# EAGLE board synapse (EAGLE 7.3.0)
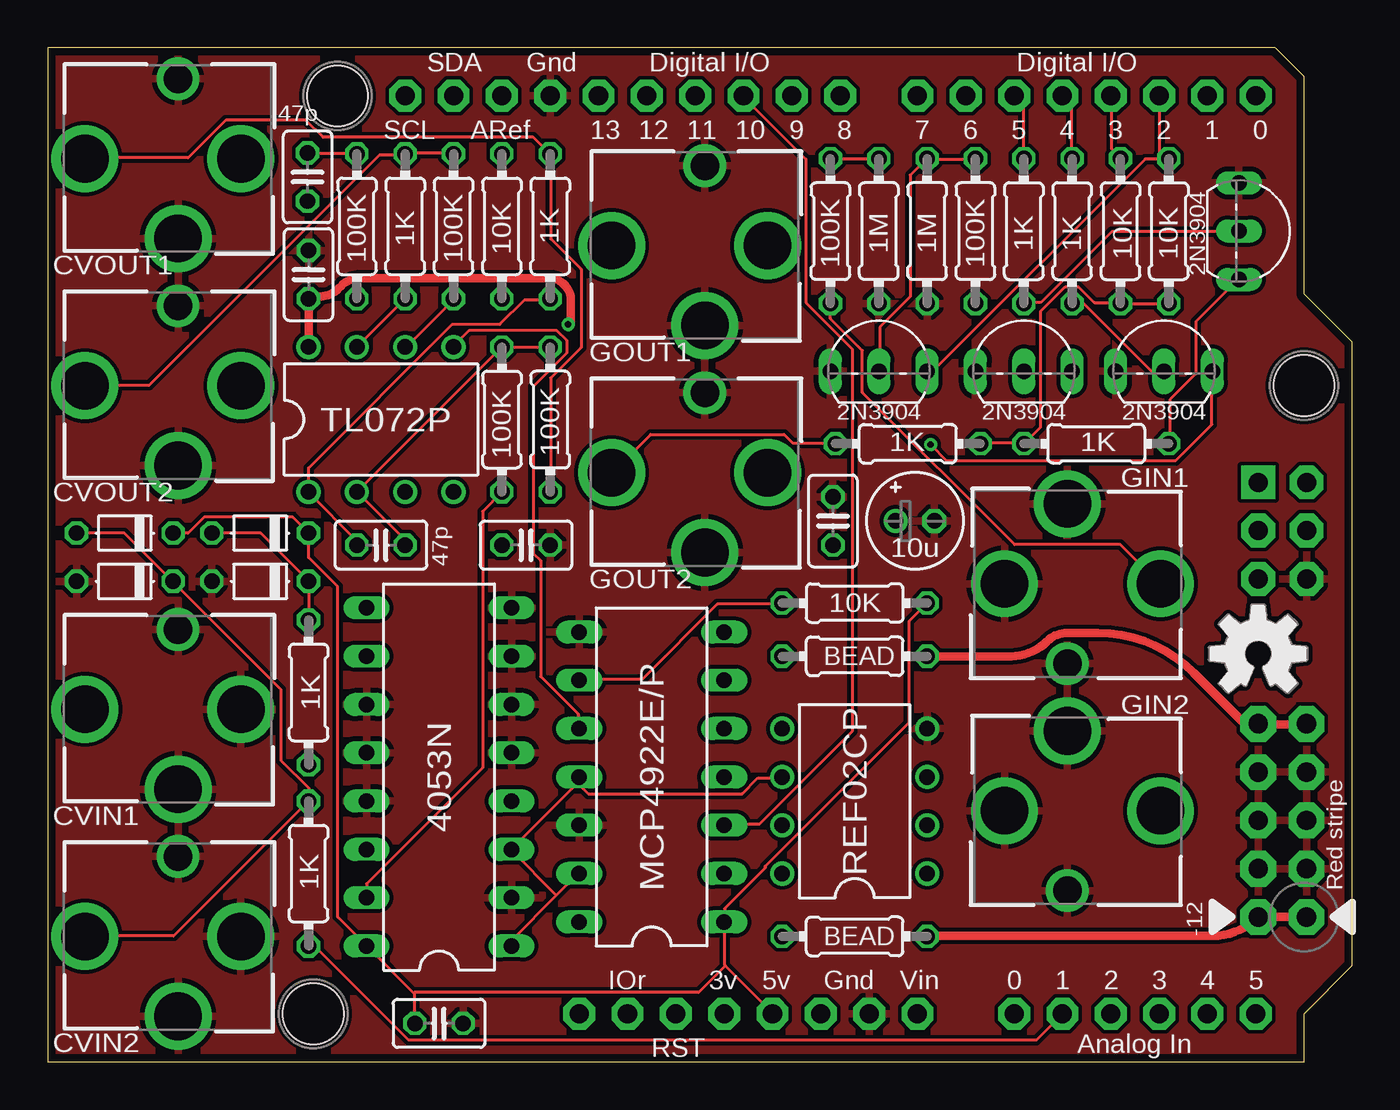
[diagram p0: board, top side]
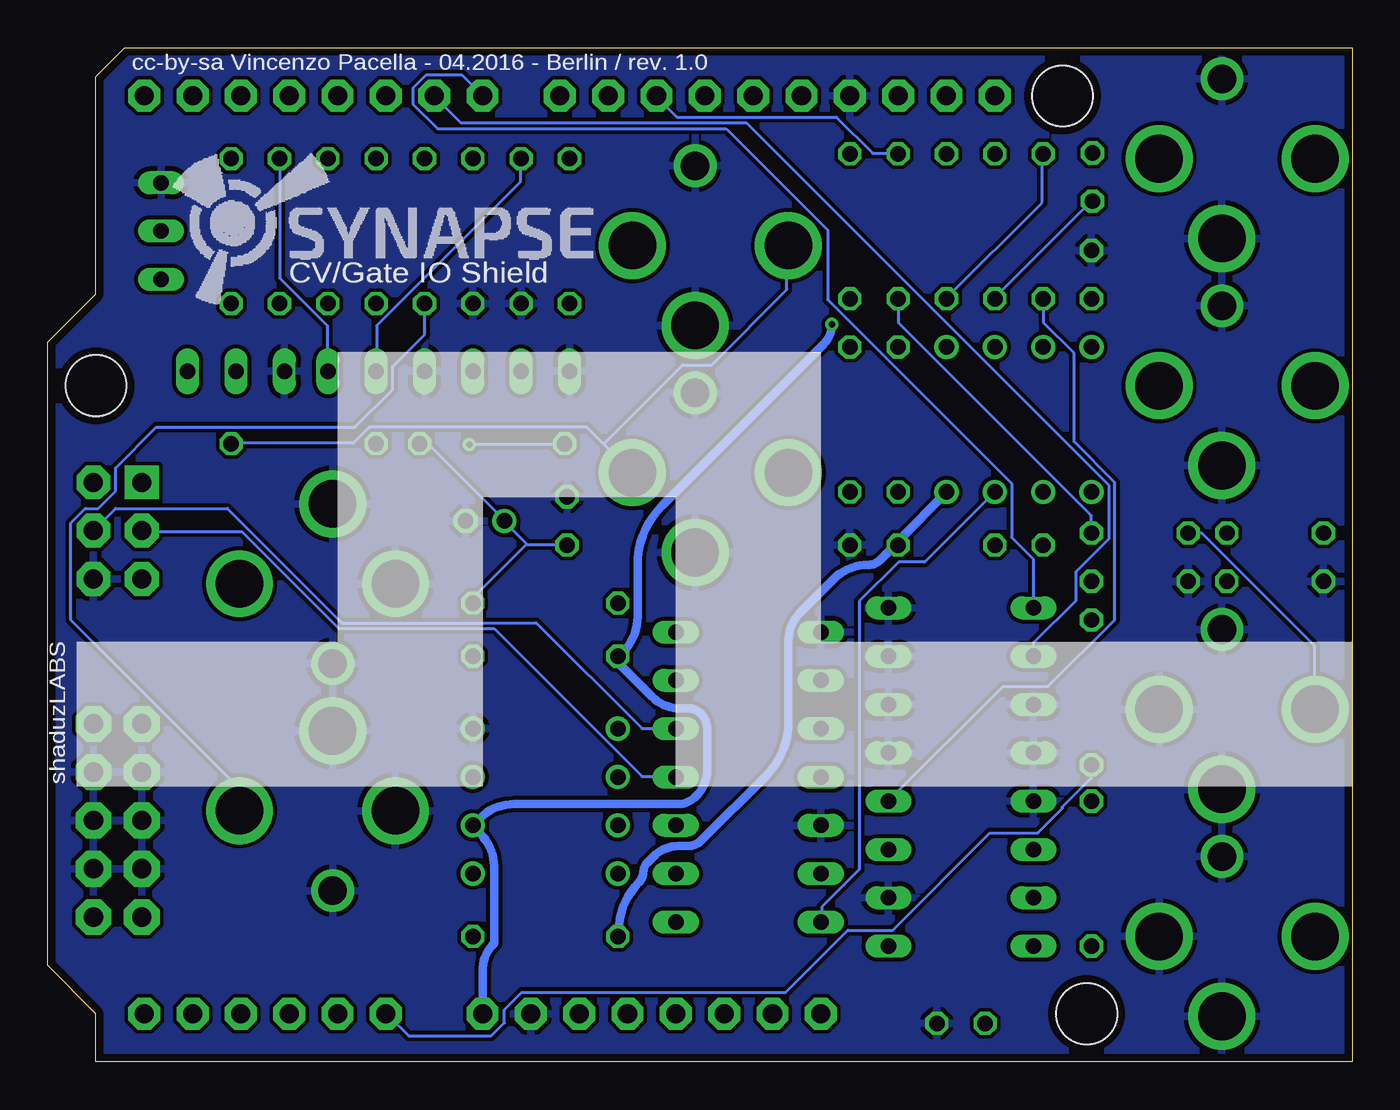
[diagram p1: board, bottom side, seen from below]

Size 68.58 x 53.34 mm. Coordinates in mm from the lower left corner, seen from the top.
Copper layers (1*16): Top 0.0356mm / dielectric 1.5011mm / Bottom 0.0356mm
Design rules "default": minimum track width 6mil, minimum drill 13mil, track to track 6mil, track to pad 6mil, pad to pad 7mil, via to via 6mil, smd to smd 6mil, copper to edge 16mil, drill to drill 6mil, minimum pad ring 7mil, minimum via ring 7mil, stop-mask expansion 4mil, vias tented up to drill 0mil, thermal gap 10mil
Net classes: 1 PWR: width 0.457 mm, clearance 0.203 mm
Holes 3.2 mm at 15.24,50.8 66.04,35.56 13.97,2.54

## Footprints (pad centres in the part's own frame; a part is rotated, then mirrored left to right if it is on the bottom)
C025-025X050 = drill 0.813 octagon: 1 -1.27,0; 2 1.27,0
E2-5 = drill 0.813 pad 1.27: + -1.016,0 | drill 0.813 pad 1.27 octagon: - 1.016,0
ERTHENVAR-JACK = drill 2.5: 1@1 -4.2,0; 2 0,-3.3; 3 0,4.9 | drill 1.5: 1@2 4.2,0
D-5 = drill 0.813 octagon: A 2.54,0; C -2.54,0
DIL14 = drill 0.813 long: 1 -7.62,-3.81; 2 -5.08,-3.81; 3 -2.54,-3.81; 4 0,-3.81; 5 2.54,-3.81; 6 5.08,-3.81; 7 7.62,-3.81; 8 7.62,3.81; 9 5.08,3.81; 10 2.54,3.81; 11 0,3.81; 12 -2.54,3.81; 13 -5.08,3.81; 14 -7.62,3.81
DIL08 = drill 0.813 pad 1.27: 1 -3.81,-3.81; 2 -1.27,-3.81; 3 1.27,-3.81; 4 3.81,-3.81; 5 3.81,3.81; 6 1.27,3.81; 7 -1.27,3.81; 8 -3.81,3.81
DIL16 = drill 0.813 long: 1 -8.89,-3.81; 2 -6.35,-3.81; 3 -3.81,-3.81; 4 -1.27,-3.81; 5 1.27,-3.81; 6 3.81,-3.81; 7 6.35,-3.81; 8 8.89,-3.81; 9 8.89,3.81; 10 6.35,3.81; 11 3.81,3.81; 12 1.27,3.81; 13 -1.27,3.81; 14 -3.81,3.81; 15 -6.35,3.81; 16 -8.89,3.81
ARDUINOR3_ICSP = drill 1 pad 1.676 octagon: 3V 35.56,2.54; 5V 38.1,2.54; A0 50.8,2.54; A1 53.34,2.54; A2 55.88,2.54; A3 58.42,2.54; A4 60.96,2.54; A5 63.5,2.54; AREF 23.876,50.8; D0 63.5,50.8; D1 60.96,50.8; D2 58.42,50.8; D3 55.88,50.8; D4 53.34,50.8; D5 50.8,50.8; D6 48.26,50.8; D7 45.72,50.8; D8 41.656,50.8; D9 39.116,50.8; D10 36.576,50.8; D11 34.036,50.8; D12 31.496,50.8; D13 28.956,50.8; GND 26.416,50.8; GND@1 43.18,2.54; GND@2 40.64,2.54; IOREF 30.48,2.54; RESERVED 27.94,2.54; RESET 33.02,2.54; SCL 18.796,50.8; SDA 21.336,50.8; VIN 45.72,2.54 | drill 1 pad 1.778 octagon: 5V_ICSP 66.167,30.48; GND@3 66.167,25.4; MOSI 66.167,27.94; RESET_ICSP 63.627,25.4; SCK 63.627,27.94 | drill 1 pad 1.778 square: MISO 63.627,30.48
0204/7 = drill 0.813 octagon: 1 -3.81,0; 2 3.81,0
TO92-EBC = drill 0.813 long: B 0,-1.27; C 2.54,-1.27; E -2.54,-1.27
POWER_10 = drill 1.016 pad 1.88 octagon: 1 -5.08,-1.27; 2 -5.08,1.27; 3 -2.54,-1.27; 4 -2.54,1.27; 5 0,-1.27; 6 0,1.27; 7 2.54,-1.27; 8 2.54,1.27; 9 5.08,-1.27; 10 5.08,1.27

## Placement (x,y rotation side)
C1  100n  [C025-025X050]  13.72,41.4 90 top
C2  100n  [C025-025X050]  25.15,27.18 0 top
C3  100n  [C025-025X050]  41.27,28.45 90 top
C4  10u  [E2-5]  45.59,28.45 0 top
C5  47p  [C025-025X050]  17.53,27.18 180 top
C6  47p  [C025-025X050]  13.67,46.53 270 top
C7  100n  [C025-025X050]  20.57,2.03 0 top
CVIN1  AUDIO-JACKERTHENVAR  [ERTHENVAR-JACK]  6.86,18.54 90 top
CVIN2  AUDIO-JACKERTHENVAR  [ERTHENVAR-JACK]  6.86,6.6 90 top
CVOUT1  AUDIO-JACKERTHENVAR  [ERTHENVAR-JACK]  6.86,47.5 90 top
CVOUT2  AUDIO-JACKERTHENVAR  [ERTHENVAR-JACK]  6.86,35.56 90 top
D1  BAT85  [D-5]  11.18,27.81 180 top
D2  BAT85  [D-5]  11.18,25.27 180 top
D3  BAT85  [D-5]  4.06,27.81 180 top
D4  BAT85  [D-5]  4.06,25.27 180 top
GIN1  AUDIO-JACKERTHENVAR  [ERTHENVAR-JACK]  53.59,25.15 270 top
GIN2  AUDIO-JACKERTHENVAR  [ERTHENVAR-JACK]  53.59,13.21 270 top
GOUT1  AUDIO-JACKERTHENVAR  [ERTHENVAR-JACK]  34.54,42.93 90 top
GOUT2  AUDIO-JACKERTHENVAR  [ERTHENVAR-JACK]  34.54,30.99 90 top
IC1  MCP4922E/P  [DIL14]  31.75,14.99 90 top
IC2  TL072P  [DIL08]  17.53,33.78 0 top
IC3  REF02CP  [DIL08]  42.42,13.72 90 top
IC4  4053N  [DIL16]  20.57,14.99 90 top
M1  ARDUINO_R3_ICSP  [ARDUINOR3_ICSP]  0,0 0 top
R1  1K  [0204/7]  51.31,43.69 270 top
R2  1K  [0204/7]  55.12,32.51 180 top
R3  1K  [0204/7]  53.85,43.69 270 top
R4  1K  [0204/7]  45.21,32.51 0 top
R5  100K  [0204/7]  41.15,43.69 90 top
R6  1M  [0204/7]  43.69,43.69 90 top
R7  10K  [0204/7]  56.39,43.69 270 top
R8  100K  [0204/7]  48.77,43.69 90 top
R9  1M  [0204/7]  46.23,43.69 90 top
R10  10K  [0204/7]  58.93,43.69 270 top
R11  10K  [0204/7]  42.42,24.13 180 top
R12  100K  [0204/7]  23.88,33.78 270 top
R13  100K  [0204/7]  26.42,33.78 90 top
R14  1K  [0204/7]  26.42,43.94 270 top
R15  100K  [0204/7]  16.26,43.94 270 top
R16  100K  [0204/7]  21.34,43.94 270 top
R17  1K  [0204/7]  18.8,43.94 270 top
R18  10K  [0204/7]  23.88,43.94 270 top
R19  1K  [0204/7]  13.72,9.91 270 top
R20  1K  [0204/7]  13.72,19.43 270 top
R21  BEAD  [0204/7]  42.42,21.34 0 top
R24  BEAD  [0204/7]  42.42,6.6 0 top
T1  2N3904  [TO92-EBC]  63.88,43.69 270 top
T2  2N3904  [TO92-EBC]  58.67,37.59 0 top
T3  2N3904  [TO92-EBC]  51.31,37.59 0 top
T4  2N3904  [TO92-EBC]  43.69,37.59 0 top
U$1  [OSHWLOGO_TOP_0.2]  63.63,21.46 0 top
U$2  POWER_SIMPLE10  [POWER_10]  64.9,12.7 90 bottom
U$3  [OSHW-LOGO-M]  63.63,21.46 0 top

## Library data of the parts
C1-C7 = resistor
CVIN1 CVIN2 CVOUT1 CVOUT2 GIN1 GIN2 GOUT1 GOUT2 = erthenvar
D1-D4 = diode
IC1 = nh-mcp4921-mcp4922
IC2 IC3 = linear
IC4 = 40xx
M1 U$1 = adafruit
R1-R21 R24 = rcl
T1-T4 = transistor-neu-to92
U$2 = eurorack
U$3 = SparkFun-Aesthetics

## Nets
3V: M1.3V
12V [PWR]: C1.1 IC2.8 IC3.2 M1.VIN R21.1
-12V [PWR]: C2.1 IC2.4 R24.1
CFG_A: IC4.10 M1.D6
CFG_B: IC4.9 M1.D7
CV_IN_A: CVIN1.3 D1.A D2.C R20.1
CV_IN_B: CVIN2.3 D3.A D4.C R19.1
CV_OUT_A: CVOUT1.3 R13.1 R14.1
CV_OUT_B: CVOUT2.3 R16.1 R17.1
D_IN_A: M1.D3 R7.1 T3.C
D_IN_B: M1.D2 R10.1 T4.C
D_OUT_A: M1.D5 R1.1
D_OUT_B: M1.D4 R3.1
DAC_A: IC1.14 IC2.3
DAC_B: IC1.10 IC2.5
DAC_CS: IC1.3 M1.D10 R18.1
GATE_IN_A: GIN1.3 R5.1
GATE_IN_B: GIN2.3 R8.1
GATE_OUT_A: GOUT1.3 GOUT2.2 R2.1 T1.C
GATE_OUT_B: GOUT2.3 R4.1 T2.C
GND [PWR]: C1.2 C2.2 C3.2 C4.- C7.2 CVIN1.1@1 CVIN1.1@2 CVIN1.2 CVIN2.1@1 CVIN2.1@2 CVIN2.2 CVOUT1.1@1 CVOUT1.1@2 CVOUT2.1@1 CVOUT2.1@2 D2.A D4.A GIN1.1@1 GIN1.1@2 GIN1.2 GIN2.1@1 GIN2.1@2 GIN2.2 GOUT1.1@1 GOUT1.1@2 GOUT2.1@1 GOUT2.1@2 IC1.8 IC1.12 IC3.4 IC4.2 IC4.5 IC4.6 IC4.7 IC4.8 IC4.11 IC4.12 IC4.13 M1.GND M1.GND@1 M1.GND@3 R6.1 R9.1 T1.E T2.E T3.E T4.E U$2.3 U$2.4 U$2.5 U$2.6 U$2.7 U$2.8
MOSI: IC1.5 M1.MOSI
N$1: M1.A1 R19.2
N$2: IC1.9 R11.2
N$3: R1.2 T1.B
N$4: R3.2 T2.B
N$5 [PWR]: R21.2 U$2.9 U$2.10
N$6: R5.2 R6.2 T3.B
N$7: R8.2 R9.2 T4.B
N$8 [PWR]: R24.2 U$2.1 U$2.2
N$9: M1.A0 R20.2
N$22: C5.1 IC2.2 R12.1 R13.2
N$23: C6.1 IC2.6 R15.1 R16.2
N$24: C5.2 IC2.1 R14.2
N$25: C6.2 IC2.7 R17.2
OFFSET_A: IC4.15 R12.2
OFFSET_B: IC4.4 R15.2
SCK: IC1.4 M1.SCK
VCC: C3.1 C4.+ C7.1 D1.C D3.C IC1.1 IC4.16 M1.5V R2.2 R4.2 R7.2 R10.2 R11.1 R18.2
VREF: IC1.11 IC1.13 IC3.6 IC4.1 IC4.3

## Tracks (layer width: path | path; a pad name or v marks a point on that pad's centre or on a via)
12V  (via drill 0.33)
  Top 0.457: IC2.8 C1.1 13.87,40.23 14.21,40.23 arc45 15.31,40.69 15.43,40.81 arc-45 16.44,41.22 26.34,41.22 arc-45 27.16,40.88 arc-45 27.51,40.05 27.51,38.94 v27.36,38.79
  Bottom 0.457: M1.VIN 45.72,4.78 arc45 45.11,6.25 45.11,10.28 arc-45 45.82,11.98 46.1,12.27 IC3.2 45.86,12.81 arc45 44.05,13.56 35.46,13.56 arc-45 34.51,13.96 34.51,13.96 arc-45 33.91,15.4 33.91,17.5 arc-45 34.25,18.32 arc-45 34.9,18.59 35.34,18.59 arc45 36.8,19.2 38.56,20.95 38.56,21.34 R21.1 38.41,21.49 38.33,21.56 arc-45 37.57,23.41 37.57,26.16 arc45 36.29,29.24 27.79,37.74 arc-45 v27.36,38.79
-12V
  Bottom 0.457: IC2.4 21.34,29.95 23.85,27.43 23.85,27.2 C2.1 24.08,27.13 24.79,26.42 arc45 25.47,26.14 arc-45 27.26,25.4 29.04,23.62 arc-45 29.64,22.16 29.64,17.86 arc45 30.79,15.08 34.23,11.64 arc45 34.93,11.35 35.44,11.35 arc-45 36.73,10.82 37.08,10.47 arc-45 37.26,10.02 arc45 37.51,9.43 arc-45 38.56,6.9 38.56,6.63 R24.1
CFG_A
  Bottom 0.152: IC4.10 16.76,22.02 14.55,24.23 14.55,25.76 12.8,27.51 12.8,30.33 31.85,49.38 46.86,49.38 48.23,50.75 M1.D6
CFG_B
  Bottom 0.152: IC4.9 16.76,26.44 17.91,27.58 17.91,30.4 27.58,40.08 27.58,43.74 32.92,49.07 48.08,49.07 49.38,50.37 49.38,51.21 48.69,51.89 46.79,51.89 45.72,50.83 M1.D7
CV_IN_A
  Top 0.152: R20.1 D2.C 13.72,25.3 11.2,27.81 D1.A
  Bottom 0.152: D1.A 7.92,27.81 1.98,21.87 1.98,18.59 CVIN1.3
CV_IN_B
  Top 0.152: D3.A 4.04,27.81 6.55,25.3 D4.C 6.63,25.22 12.27,19.58 12.27,15.85 13.72,14.4 R19.1 6.63,6.63 1.98,6.63 CVIN2.3
CV_OUT_A
  Top 0.152: R13.1 26.44,30.02 26.44,35.97 28.04,37.57 28.04,41.68 26.44,43.28 26.44,47.7 R14.1 26.36,47.78 25.53,48.62 14.48,48.62 13.56,49.53 9.37,49.53 7.39,47.55 1.98,47.55 CVOUT1.3
CV_OUT_B
  Top 0.152: R16.1 21.34,47.78 18.82,47.78 R17.1 18.75,47.7 17.45,47.7 5.33,35.59 1.98,35.59 CVOUT2.3
D_IN_A
  Top 0.152: M1.D3 55.93,50.75 55.93,48.01 56.39,47.55 R7.1
  Bottom 0.152: R7.1 56.39,41.22 53.87,38.71 53.87,36.35 T3.C
D_IN_B
  Top 0.152: 58.45,47.47 58.9,47.47 R10.1 58.45,47.47 | 58.45,47.47 57.68,47.47 46.56,36.35 46.25,36.35 T4.C | 58.45,47.47 58.45,50.75 M1.D2
D_OUT_A
  Top 0.152: R1.1 51.28,47.55 51.28,50.29 50.83,50.75 M1.D5
D_OUT_B
  Top 0.152: R3.1 53.8,47.55 53.8,50.29 53.34,50.75 M1.D4
DAC_A
  Bottom 0.152: IC2.3 22.48,26.29 23.85,26.29 25.91,24.23 25.91,10.13 27.89,8.15 27.89,7.39 IC1.14
DAC_B
  Top 0.152: IC1.10 27.89,17.53 27.89,18.29 25.91,20.27 25.91,26.36 25.53,26.75 25.53,35.51 27.28,37.26 27.28,37.95 26.75,38.48 22.17,38.48 21.34,37.64 IC2.5
DAC_CS
  Top 0.152: IC1.3 35.59,12.5 37.41,12.5 42.29,17.37 42.29,37.49 39.85,39.93 39.85,47.47 36.58,50.75 M1.D10
  Bottom 0.152: R18.1 23.93,47.78 25.22,47.78 27.13,49.68 35.51,49.68 36.58,50.75 M1.D10
GATE_IN_A
  Top 0.152: R5.1 41.15,39.09 42.82,37.41 42.82,35.2 50.83,27.2 56.39,27.2 58.45,25.15 GIN1.3
GATE_IN_B
  Bottom 0.152: R8.1 48.77,38.25 50.44,36.58 50.44,35.36 52.43,33.38 62.87,33.38 65,31.24 65,30.02 65.91,29.11 66.6,29.11 67.36,28.35 67.36,23.24 58.52,14.4 58.52,13.26 GIN2.3
GATE_OUT_A
  Top 0.152: R2.1 58.98,32.54 58.98,34.82 60.35,36.2 60.35,38.94 62.56,41.15 T1.C
  Bottom 0.152: 39.36,32.5 37.87,31.01 GOUT2.2 | 39.36,32.5 40.23,33.38 51.66,33.38 52.5,32.54 58.9,32.54 R2.1 | 39.36,32.5 35.2,36.65 33.68,36.65 29.72,40.62 29.72,42.9 GOUT1.3
GATE_OUT_B  (via drill 0.33)
  Top 0.152: R4.1 41.38,32.54 39.17,32.54 38.71,32.99 31.7,32.99 29.72,31.01 GOUT2.3 | v46.41,32.46 47.24,31.62 59.28,31.62 61.19,33.53 61.19,36.27 T2.C
  Bottom 0.152: v46.41,32.46 41.45,32.46 R4.1
GND
  pour Bottom: -2.54,55.88 -2.54,-2.54 69.85,-2.54 69.85,55.88
  pour Top: -2.54,55.88 -2.54,-2.54 69.85,-2.54 69.85,55.88
MOSI
  Bottom 0.152: IC1.5 37.34,17.53 42.9,23.09 53.11,23.09 59.13,29.11 65,29.11 M1.MOSI
N$1
  Top 0.152: R19.2 14.02,6.1 18.97,1.14 51.97,1.14 53.34,2.52 M1.A1
N$2
  Top 0.152: IC1.9 27.96,20.12 31.24,20.12 35.2,24.08 38.56,24.08 R11.2
N$3
  Top 0.152: R1.2 51.36,39.93 52.2,39.93 55.93,43.66 62.56,43.66 T1.B
N$4
  Top 0.152: T2.B 58.67,36.35 57.99,36.35 54.48,39.85 53.87,39.85 R3.2
N$5
  Top 0.457: R21.2 50.64,21.34 arc45 52.52,22.11 arc-45 53.58,22.55 55.2,22.55 arc-45 60.22,20.48 62.87,17.83 63.63,17.83 U$2.9 63.78,17.75 66.14,17.75 U$2.10
N$6
  Top 0.152: R5.2 41.15,47.47 43.66,47.47 R6.2
  Bottom 0.152: T3.B 51.28,36.35 51.28,38.71 43.74,46.25 43.74,47.47 R6.2
N$7
  Top 0.152: T4.B 43.74,36.35 43.74,38.63 45.34,40.23 45.34,46.63 46.18,47.47 R9.2 46.25,47.47 48.77,47.47 R8.2
N$8
  Top 0.457: R24.2 46.25,6.63 61.23,6.63 arc45 U$2.1 U$2.2
N$9
  Bottom 0.152: R20.2 13.72,14.94 15.24,13.41 15.24,13.34 16.54,12.04 19.05,12.04 24.16,6.93 26.52,6.93 29.79,3.66 43.66,3.66 44.58,2.74 44.58,2.06 45.26,1.37 49.61,1.37 50.75,2.52 M1.A0
N$22
  Top 0.152: R13.2 26.36,37.57 23.93,37.57 R12.1 IC2.2 16.31,29.95 18.75,27.51 18.75,27.2 C5.1
N$23
  Top 0.152: R15.1 16.23,47.78 13.72,47.78 C6.1 | R16.2 21.34,40.08 18.82,37.57 IC2.6
  Bottom 0.152: R15.1 16.31,47.7 16.31,45.19 21.34,40.16 R16.2
N$24
  Top 0.152: C5.2 16.23,27.2 16.23,27.43 13.72,29.95 IC2.1 13.72,31.24 21.26,38.79 23.77,38.79 25.07,40.08 26.36,40.08 R14.2
N$25
  Top 0.152: R17.2 IC2.7
  Bottom 0.152: C6.2 13.72,45.26 18.82,40.16 R17.2
OFFSET_A
  Top 0.152: IC4.15 16.76,9.37 22.86,15.47 22.86,28.96 R12.2
OFFSET_B
  Bottom 0.152: IC4.4 18.36,19.74 16,19.74 12.5,23.24 12.5,30.48 14.63,32.61 14.63,37.26 16.23,38.86 16.23,40.08 R15.2
SCK
  Bottom 0.152: IC1.4 35.59,15.01 37.34,15.01 45.11,22.78 53.26,22.78 58.37,27.89 63.63,27.89 M1.SCK
VCC
  Top 0.152: D3.C 7.39,27.81 8.23,28.65 12.88,28.65 D1.C 13.72,26.52 15.24,24.99 15.24,7.62 IC4.16 19.24,3.62 | 19.24,3.62 19.28,3.58 19.28,2.06 C7.1 | 35.62,5.07 38.1,2.59 M1.5V | 35.62,5.07 35.59,5.11 35.59,7.32 IC1.1 35.59,7.39 35.59,8.08 37.72,10.21 37.72,10.29 45.26,17.83 45.26,23.16 R11.1 | 35.62,5.07 34.21,3.66 19.28,3.66 19.24,3.62 | R10.2 58.9,39.85 56.39,39.85 R7.2 56.39,39.93 55.02,39.93 54.18,40.77 53.49,40.77 52.2,39.47 52.2,33.38 51.36,32.54 R2.2 51.28,32.54 49.07,32.54 R4.2
  Bottom 0.152: D1.C 13.72,28.73 23.85,38.86 23.85,40.08 R18.2 | 43.4,27.24 44.58,28.42 C4.+ 44.58,28.5 48.54,32.46 49,32.46 R4.2 | 43.4,27.24 43.36,27.2 41.3,27.2 C3.1 | 43.4,27.24 46.18,24.46 46.18,24.16 R11.1
VREF
  Top 0.152: IC4.1 24.38,6.4 26.75,8.76 | 26.75,8.76 27.89,9.91 IC1.13 | 26.75,8.76 24.38,11.12 IC4.3 24.38,11.2 27.89,14.71 27.89,14.94 IC1.11 27.89,14.63 28.42,14.1 36.5,14.1 37.34,14.94 38.56,14.94 IC3.6

## Text on the board
tPlace: Red stripe
tNames: -12
bNames: cc-by-sa Vincenzo Pacella - 04.2016 - Berlin / rev. 1.0 | CV/Gate IO Shield | shaduzLABS